# Altium PCB Conn_Batt_Panel.PcbDoc
Units mm, origin at the board's own origin, x right, y up, seen from the top; angles counter-clockwise.
Board outline 96 x 38 mm, 2 copper layers (Component Side, Solder Side), stack 1.57 mm thick; 26 components, 7 nets, 66 pads, 0 vias.
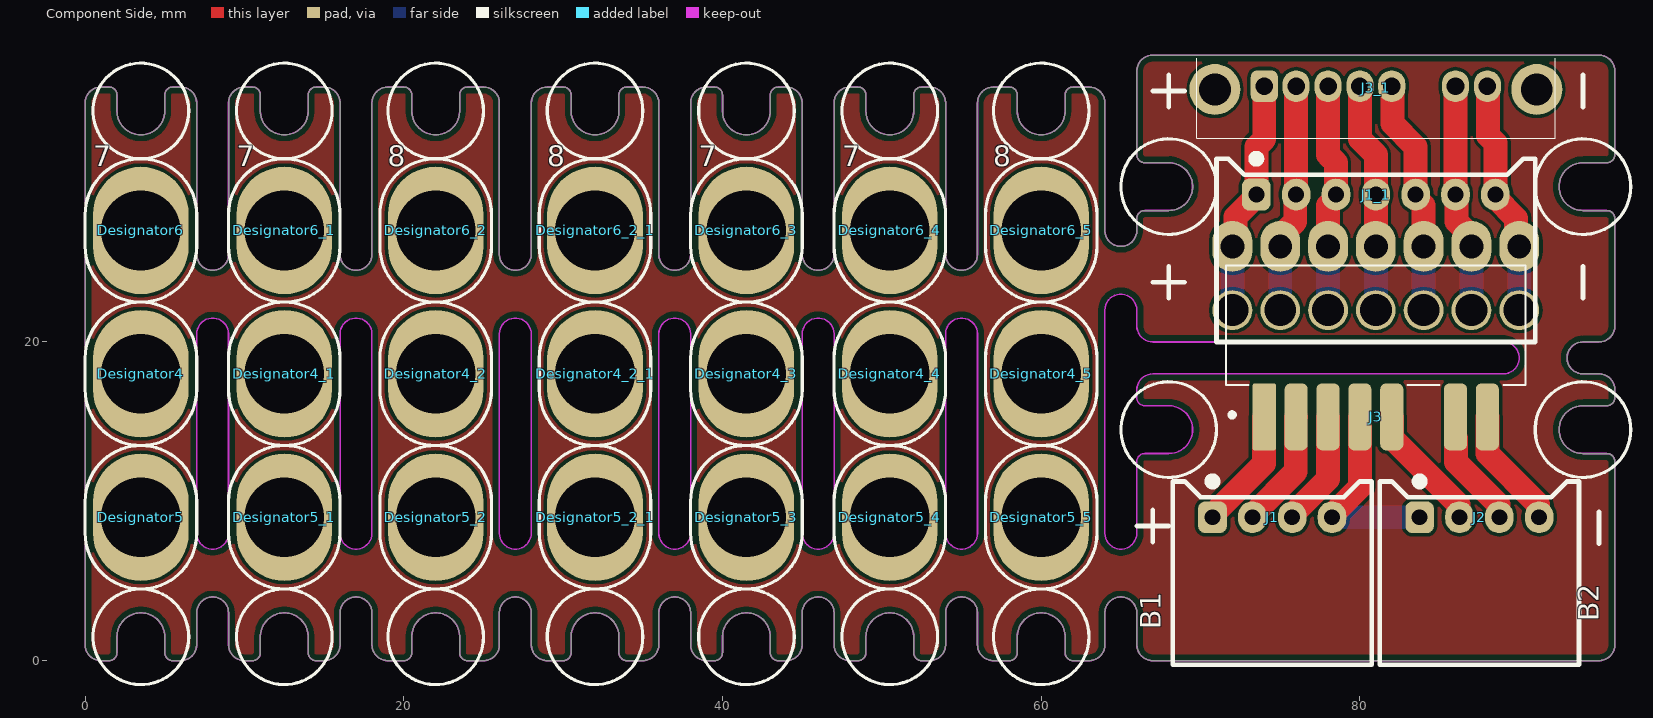
[diagram p0: Component Side view]
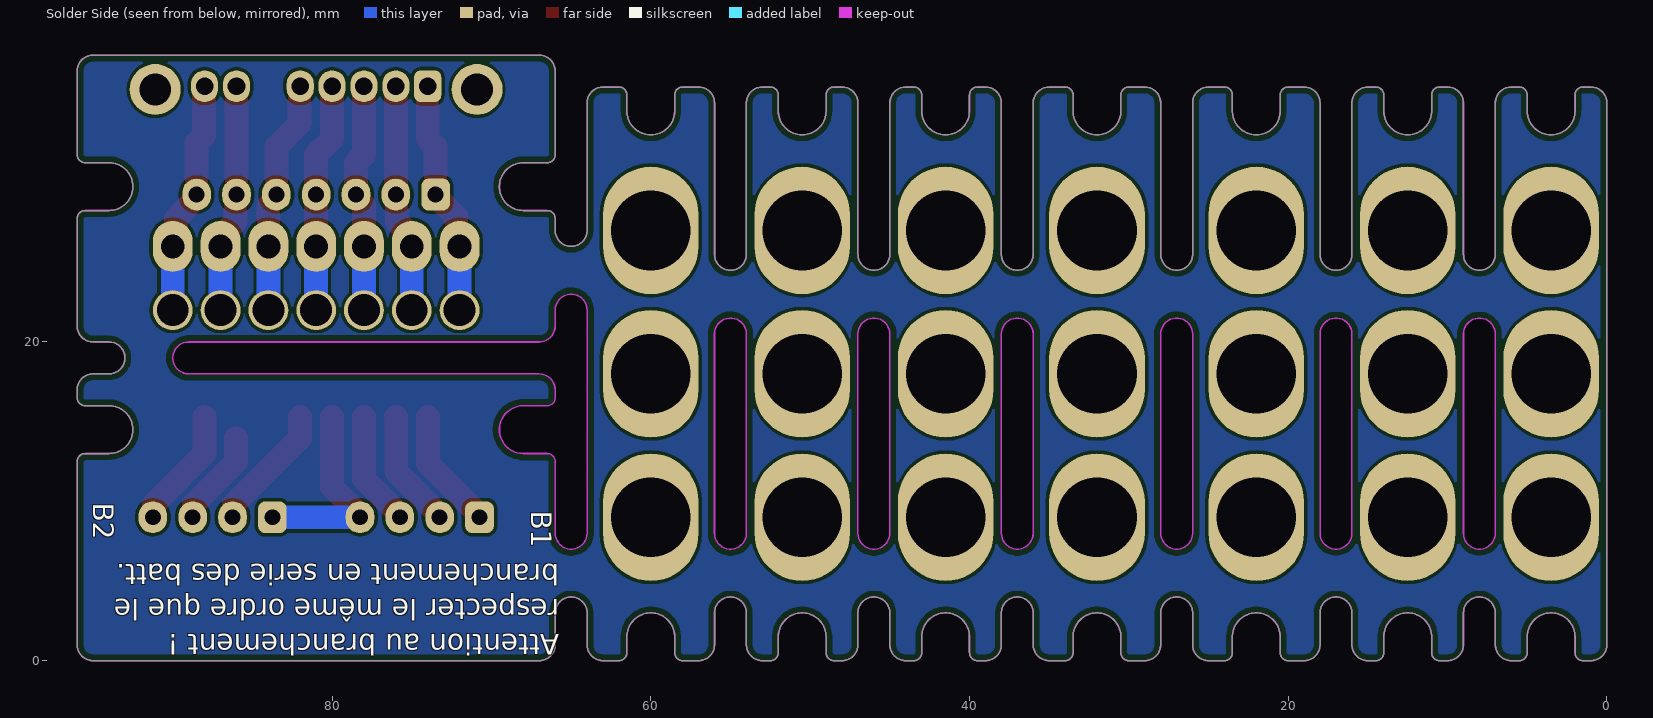
[diagram p1: Solder Side view, seen from below]

## Layer stack, top to bottom
Top Solder: solder mask 0.01, Solder Resist, Dk 3.5
Component Side: signal copper 0.035
Dielectric 1: core 1.5, FR-4, Dk 4.8
Solder Side: signal copper 0.035
Bottom Solder: solder mask 0.01, Solder Resist, Dk 3.5

## Board outline
1,0 cw(c1,1) 0,1 0,35 cw(c1,35) 1,36 1.5,36 cw(c1.5,35.5) 2,35.5 2,34.5 ccw(c3.5,34.5) 5,34.5 5,35.5 cw(c5.5,35.5) 5.5,36 6,36 cw(c6,35) 7,35 7,25.5 ccw(c8,25.5) 9,25.5 9,35 cw(c10,35) 10,36 10.5,36 cw(c10.5,35.5) 11,35.5 11,34.5 ccw(c12.5,34.5) 14,34.5 14,35.5 cw(c14.5,35.5) 14.5,36 15,36 cw(c15,35) 16,35 16,25.5 ccw(c17,25.5) 18,25.5 18,35 cw(c19,35) 19,36 20,36 cw(c20,35.5) 20.5,35.5 20.5,34.5 ccw(c22,34.5) 23.5,34.5 23.5,35.5 cw(c24,35.5) 24,36 25,36 cw(c25,35) 26,35 26,25.5 ccw(c27,25.5) 28,25.5 28,35 cw(c29,35) 29,36 30,36 cw(c30,35.5) 30.5,35.5 30.5,34.5 ccw(c32,34.5) 33.5,34.5 33.5,35.5 cw(c34,35.5) 34,36 35,36 cw(c35,35) 36,35 36,25.5 ccw(c37,25.5) 38,25.5 38,35 cw(c39,35) 39,36 39.5,36 cw(c39.5,35.5) 40,35.5 40,34.5 ccw(c41.5,34.5) 43,34.5 43,35.5 cw(c43.5,35.5) 43.5,36 44,36 cw(c44,35) 45,35 45,25.5 ccw(c46,25.5) 47,25.5 47,35 cw(c48,35) 48,36 48.5,36 cw(c48.5,35.5) 49,35.5 49,34.5 ccw(c50.5,34.5) 52,34.5 52,35.5 cw(c52.5,35.5) 52.5,36 53,36 cw(c53,35) 54,35 54,25.5 ccw(c55,25.5) 56,25.5 56,35 cw(c57,35) 57,36 58,36 cw(c58,35.5) 58.5,35.5 58.5,34.5 ccw(c60,34.5) 61.5,34.5 61.5,35.5 cw(c62,35.5) 62,36 63,36 cw(c63,35) 64,35 64,27 ccw(c65,27) 66,27 66,27.75 cw(c66.5,27.75) 66.5,28.25 68,28.25 ccw(c68,29.75) 68,31.25 66.5,31.25 cw(c66.5,31.75) 66,31.75 66,37 cw(c67,37) 67,38 95.002,38 95,38 cw(c95,37) 96,37 96,31.75 cw(c95.5,31.75) 95.5,31.25 94,31.25 ccw(c94,29.75) 94,28.25 95.5,28.25 cw(c95.5,27.75) 96,27.75 96,21 cw(c95,21) 95,20 94,20 ccw(c94,19) 94,18 95,18 cw(c95,17) 96,17 96,16.5 cw(c95.5,16.5) 95.5,16 94,16 ccw(c94,14.5) 94,13 95.5,13 cw(c95.5,12.5) 96,12.5 96,1 cw(c95,1) 95,0 67,0 cw(c67,1) 66,1 66,3 ccw(c65,3) 64,3 64,1 cw(c63,1) 63,0 62,0 cw(c62,0.5) 61.5,0.5 61.5,1.5 ccw(c60,1.5) 58.5,1.5 58.5,0.5 cw(c58,0.5) 58,0 57,0 cw(c57,1) 56,1 56,3 ccw(c55,3) 54,3 54,1 cw(c53,1) 53,0 52.5,0 cw(c52.5,0.5) 52,0.5 52,1.5 ccw(c50.5,1.5) 49,1.5 49,0.5 cw(c48.5,0.5) 48.5,0 48,0 cw(c48,1) 47,1 47,3 ccw(c46,3) 45,3 45,1 cw(c44,1) 44,0 43.5,0 cw(c43.5,0.5) 43,0.5 43,1.5 ccw(c41.5,1.5) 40,1.5 40,0.5 cw(c39.5,0.5) 39.5,0 39,0 cw(c39,1) 38,1 38,3 ccw(c37,3) 36,3 36,1 cw(c35,1) 35,0 34,0 cw(c34,0.5) 33.5,0.5 33.5,1.5 ccw(c32,1.5) 30.5,1.5 30.5,0.5 cw(c30,0.5) 30,0 29,0 cw(c29,1) 28,1 28,3 ccw(c27,3) 26,3 26,1 cw(c25,1) 25,0 24,0 cw(c24,0.5) 23.5,0.5 23.5,1.5 ccw(c22,1.5) 20.5,1.5 20.5,0.5 cw(c20,0.5) 20,0 19,0 cw(c19,1) 18,1 18,3 ccw(c17,3) 16,3 16,1 cw(c15,1) 15,0 14.5,0 cw(c14.5,0.5) 14,0.5 14,1.5 ccw(c12.5,1.5) 11,1.5 11,0.5 cw(c10.5,0.5) 10.5,0 10,0 cw(c10,1) 9,1 9,3 ccw(c8,3) 7,3 7,1 cw(c6,1) 6,0 5.5,0 cw(c5.5,0.5) 5,0.5 5,1.5 ccw(c3.5,1.5) 2,1.5 2,0.5 cw(c1.5,0.5) 1.5,0
cut-out: 54,8 54,20.5 cw(c55,20.5) 56,20.5 56,8 cw(c55,8)
cut-out: 45,8 45,20.5 cw(c46,20.5) 47,20.5 47,8 cw(c46,8)
cut-out: 36,8 36,20.5 cw(c37,20.5) 38,20.5 38,8 cw(c37,8)
cut-out: 26,8 26,20.5 cw(c27,20.5) 28,20.5 28,8 cw(c27,8)
cut-out: 16,8 16,20.5 cw(c17,20.5) 18,20.5 18,8 cw(c17,8)
cut-out: 7,8 7,20.5 cw(c8,20.5) 9,20.5 9,8 cw(c8,8)
cut-out: 64,8 ccw(c65,8) 66,8 66,12.5 cw(c66.5,12.5) 66.5,13 68,13 ccw(c68,14.5) 68,16 66.5,16 cw(c66.5,16.5) 66,16.5 66,17 cw(c67,17) 67,18 89,18 ccw(c89,19) 89,20 67,20 cw(c67,21) 66,21 66,22 ccw(c65,22) 64,22

## Design rules (kind name [scope] priority, off if disabled: settings)
AssemblyTestPointUsage [All] p1 off:
AssemblyTestpoint [All] p1 off: testpointundercomponent=TRUE minsize=1.016 maxsize=2.54 preferedsize=1.524 minholesize=0 maxholesize=1.016 preferedholesize=0.813 testpointgrid=0.025 usegrid=TRUE gridtolerance=0 allowsidetop=TRUE allowsidebottom=TRUE
BoardOutlineClearance [All] p1: gap=0.4 ignorepadtopadclearanceinfootprint=FALSE
Clearance Clearance_polygon [InPolygon] p1: gap=0.2 ignorepadtopadclearanceinfootprint=FALSE except(0: Arc-Hole Track-Hole SMDPad-Hole THPad-Hole Via-Hole Fill-Hole Poly-Hole Region-Hole Text-Hole)
Clearance Clearance_for_power_net [InNetClass('Power') vs InNet('GND')] p2: gap=0.2 ignorepadtopadclearanceinfootprint=TRUE except(0: Arc-Hole Track-Hole SMDPad-Hole THPad-Hole Via-Hole Fill-Hole Poly-Hole Region-Hole Text-Hole)
Clearance Clearance_general [All] p3: gap=0.127 ignorepadtopadclearanceinfootprint=FALSE except(0: Arc-Hole Track-Hole SMDPad-Hole THPad-Hole Via-Hole Fill-Hole Poly-Hole Region-Hole Text-Hole)
ComponentClearance [All] p1: gap=0 collisioncheckmode=3 verticalgap=0 showdistances=FALSE
DiffPairsRouting [All] p1 off: maxlimit=0.254 minlimit=0.127 mostfreqgap=0.254 toplayer_minwidth=0.381 toplayer_maxwidth=0.381 toplayer_prefwidth=0.381 bottomlayer_minwidth=0.381 bottomlayer_maxwidth=0.381 bottomlayer_prefwidth=0.381 maxuncoupledlength=12.7
FabricationTestPointUsage TestPointUsage [All] p1 off: valid=0 allowmultiple=FALSE
FabricationTestpoint Testpoint [All] p1 off: side=3 testpointundercomponent=TRUE minsize=1.016 maxsize=2.54 preferedsize=1.524 minholesize=0 maxholesize=1.016 preferedholesize=0.813 testpointgrid=0.025 allowsidetop=TRUE allowsidebottom=TRUE usegrid=TRUE gridtolerance=0
FanoutControl Fanout_BGA [IsBGA] p1 off: bgadir=Out bgaviamode=Centered fanoutstyle=Auto fanoutdirection=Alternating viagrid=0.025 // Fanout_BGA (Default Rule)
FanoutControl Fanout_LCC [IsLCC] p2 off: bgadir=Out bgaviamode=Centered fanoutstyle=Auto fanoutdirection=Alternating viagrid=0.025 // Fanout_LCC (Default Rule)
FanoutControl Fanout_SOIC [IsSOIC] p3 off: bgadir=Out bgaviamode=Centered fanoutstyle=Auto fanoutdirection=Alternating viagrid=0.025 // Fanout_SOIC (Default Rule)
FanoutControl Fanout_Small [(CompPinCount < 5)] p4 off: bgadir=Out bgaviamode=Centered fanoutstyle=Auto fanoutdirection=OutThenIn viagrid=0.025 // Fanout_Small (Default Rule)
FanoutControl Fanout_Default [All] p5 off: bgadir=Out bgaviamode=Centered fanoutstyle=Auto fanoutdirection=Alternating viagrid=0.025 // Fanout_Default (Default Rule)
Height [All] p1: minheight=0 maxheight=50 prefheight=10
HoleSize [All] p1: absolutevalues=TRUE maxlimit=6.3 minlimit=0.2 maxpercent=80.000 minpercent=20.000
HoleToHoleClearance [All] p1: gap=0.4 allowstackedmicrovias=TRUE
MinimumAnnularRing [All] p1: minimumring=0.076
MinimumSolderMaskSliver [All] p1: minsoldermaskwidth=0.15
MinimumSolderMaskSliver SilkscreenOverComponentPads [All] p2 off: minsoldermaskwidth=0.254
NetAntennae [All] p1 off: netantennaetolerance=0
PlaneClearance [All] p1: clearance=0.5
PlaneConnect [All] p1: planeconnectstyle=Relief reliefexpansion=0.4 reliefentries=4 reliefconductorwidth=0.3 reliefairgap=0.2
PolygonConnect [All] p1: thpad.connectstyle=Relief thpad.reliefconductorwidth=0.25 thpad.reliefentries=4 thpad.polygonreliefangle="90 Angle" thpad.airgapwidth=0.254 smdpad.connectstyle=Relief smdpad.reliefconductorwidth=0.25 smdpad.reliefentries=4 smdpad.polygonreliefangle="90 Angle" smdpad.airgapwidth=0.254 via.connectstyle=Direct via.reliefconductorwidth=0.25 via.reliefentries=4 via.polygonreliefangle="90 Angle" via.airgapwidth=0.254
PolygonConnect PolygonConnect_Via_GND [All vs (InNet('GND') AND  IsVia)] p2: thpad.connectstyle=Relief thpad.reliefconductorwidth=0.25 thpad.reliefentries=4 thpad.polygonreliefangle="90 Angle" thpad.airgapwidth=0.254 smdpad.connectstyle=Relief smdpad.reliefconductorwidth=0.25 smdpad.reliefentries=4 smdpad.polygonreliefangle="90 Angle" smdpad.airgapwidth=0.254 via.connectstyle=Direct via.reliefconductorwidth=0.25 via.reliefentries=4 via.polygonreliefangle="90 Angle" via.airgapwidth=0.254
PolygonConnect PolygonConnect_Via_Power [(InNetClass('Power')  AND  IsVia)] p3: connectstyle=Relief reliefconductorwidth=0.25 reliefentries=4 polygonreliefangle="90 Angle" airgapwidth=0.254
RoutingCorners [All] p1: cornerstyle=45-Degree minsetback=1.5 maxsetback=2.54
RoutingVias [All] p1: holewidth=0.3 width=0.6 viastyle="Through Hole" minholewidth=0.3 minwidth=0.6 maxholewidth=0.3 maxwidth=1
SilkToSilkClearance [All] p1 off: silktosilkclearance=0.1
SolderMaskExpansion [All] p1: expansion=0.075 istentingtop=FALSE
Width [All] p1: maxlimit=15 minlimit=0.127 preferedwidth=0.5
10 further rules are at their usual default settings.

## Components (designator, comment, footprint, x,y, rotation, side; value= is the part's Value field where it differs from the comment)
Designator4 "Comment" CONN_Bullet-3.5-F 3.5,18 r0 top
Designator4_1 "Comment" CONN_Bullet-3.5-F 12.5,18 r0 top
Designator4_2 "Comment" CONN_Bullet-3.5-F 22,18 r0 top
Designator4_2_1 "Comment" CONN_Bullet-3.5-F 32,18 r0 top
Designator4_3 "Comment" CONN_Bullet-3.5-M 41.5,18 r0 top
Designator4_4 "Comment" CONN_Bullet-3.5-M 50.5,18 r0 top
Designator4_5 "Comment" CONN_Bullet-3.5-M 60,18 r0 top
Designator5 "Comment" CONN_Bullet-4-F 3.5,9 r0 top
Designator5_1 "Comment" CONN_Bullet-4-F 12.5,9 r0 top
Designator5_2 "Comment" CONN_Bullet-4-F 22,9 r0 top
Designator5_2_1 "Comment" CONN_Bullet-4-F 32,9 r0 top
Designator5_3 "Comment" CONN_Bullet-4-M 41.5,9 r0 top
Designator5_4 "Comment" CONN_Bullet-4-M 50.5,9 r0 top
Designator5_5 "Comment" CONN_Bullet-4-M 60,9 r0 top
Designator6 "Comment" CONN_Bullet-4-F 3.5,27 r0 top
Designator6_1 "Comment" CONN_Bullet-4-F 12.5,27 r0 top
Designator6_2 "Comment" CONN_Bullet-4-F 22,27 r0 top
Designator6_2_1 "Comment" CONN_Bullet-4-F 32,27 r0 top
Designator6_3 "Comment" CONN_Bullet-4-M 41.5,27 r0 top
Designator6_4 "Comment" CONN_Bullet-4-M 50.5,27 r0 top
Designator6_5 "Comment" CONN_Bullet-4-M 60,27 r0 top
J1 "Comment" CONN_JST_S4B-XH-A 74.5,9 r0 top
J1_1 "Comment" CONN_JST_S7B-XH-A 81,29.25 r0 top
J2 "Comment" CONN_JST_S4B-XH-A 87.5,9 r0 top
J3 "Comment" CONN_TE_1827684-1 81,15.3 r180 top
J3_1 "Comment" Conn_TE_1-1827654-1 81,36.05 r180 top

## Footprints (in the part's own frame and the unit in brackets; to place one, negate y for a bottom-side part, rotate by r counter-clockwise, add the part's x,y. Pads: shape width x height; smd on the part's side, far side on the other; paste and mask are expansions set on the pad)
CONN_Bullet-3.5-F [mm] "bullet connector  3,5mm femelle"
  oval 6x8 hole 5: 1(0,0)
  silkscreen extent -3.5,-4.5 3.5,4.5, body extent -2.4,-2.4 2.4,2.4, height 9.65
CONN_Bullet-3.5-M [mm] "bullet connector  3,5mm male"
  oval 6x8 hole 5: 1(0,0)
  silkscreen extent -3.5,-4.5 3.5,4.5, body extent -2.5,-2.5 2.5,2.5, height 9.85
CONN_Bullet-4-F [mm] "bullet connector 4mm femelle"
  oval 6x8 hole 5: 1(0,0)
  silkscreen extent -3.5,-4.5 3.5,4.5, body extent -2.4,-2.4 2.4,2.4, height 10
CONN_Bullet-4-M [mm] "bullet connector 4mm male"
  oval 6x8 hole 5: 1(0,0)
  silkscreen extent -3.5,-4.5 3.5,4.5, body extent -2.5,-2.5 2.5,2.5, height 17.4
CONN_JST_S4B-XH-A [mm]
  rrect50% 1.8x2 hole 1: 1(-3.75,0)
  oval 1.8x2 hole 1: 2(-1.25,0) 3(1.25,0) 4(3.75,0)
  silkscreen extent -6.25,-9.25 6.25,2.5, body extent -6.2,-9.2 6.2,2.3, height 6.1
CONN_JST_S7B-XH-A [mm]
  rrect50% 1.8x2 hole 1: 1(-7.5,0)
  oval 1.8x2 hole 1: 2(-5,0) 3(-2.5,0) 4(0,0) 5(2.5,0) 6(5,0) 7(7.5,0)
  silkscreen extent -10,-9.25 10,2.5, body extent -9.95,-9.2 9.95,2.3, height 6.1
Conn_TE_1-1827654-1 [mm]
  rrect50% 1.7x2 hole 1.1 mask+0.05: 1(7,0)
  oval 1.7x2 hole 1.1: 2(5,0) 3(3,0) 4(1,0) 5(-1,0) 6(-5,0) 7(-7,0)
  rrect100% 3.2x3.2 hole 2 mask+0.05: 8(-10.1,0.2) 9(10.1,0.2)
  silkscreen extent -11.25,-1.75 11.25,3.25, body extent -11.3,-8.1 11.3,3.3, height 4
CONN_TE_1827684-1 [mm]
  rrect15% 1.45x4.2 smd: 1(7,0)
  rrect50% 1.45x4.2 smd: 2(5,0) 3(3,0) 4(1,0) 5(-1,0) 6(-5,0) 7(-7,0)
  silkscreen extent -9.4,-9.5 9.4,0.01, body extent -9.4,-9.03 9.4,1.67, height 3.3

## Free pads (board coordinates)
  round 2.5 hole 2: 3(72,22) 3(75,22) 3(78,22) 3(81,22) 3(84,22) 3(87,22) 3(90,22)
  oval 2.5x3.2 hole 1.5: 3(72,26) 3(75,26) 3(78,26) 3(81,26) 3(84,26) 3(87,26) 3(90,26)

## Nets (pads, with @x,y where several pads share a name; then routed paths per layer and width w, separated by ;. In a path a pad name is that pad's centre, name@x,y a point inside that pad or via, vN(x,y) a via of type N, cw(c..) or ccw(c..) an arc to the next point about the centre after c; other vN are vias at no path point)
B1_1_C3: 
B1_2_C1: 
B1_2_C2: 
B1_4_GND: 
B2_2_C2: 
B2_3_C1: 
B2_4_GND: 
pads on no net: Designator4.1 Designator4_1.1 Designator4_2.1 Designator4_2_1.1 Designator4_3.1 Designator4_4.1 Designator4_5.1 Designator5.1 Designator5_1.1 Designator5_2.1 Designator5_2_1.1 Designator5_3.1 Designator5_4.1 Designator5_5.1 Designator6.1 Designator6_1.1 Designator6_2.1 Designator6_2_1.1 Designator6_3.1 Designator6_4.1 Designator6_5.1 J1.1 J1.2 J1.3 J1.4 J1_1.1 J1_1.2 J1_1.3 J1_1.4 J1_1.5 J1_1.6 J1_1.7 J2.1 J2.2 J2.3 J2.4 J3.1 J3.2 J3.3 J3.4 J3.5 J3.6 J3.7 J3_1.1 J3_1.2 J3_1.3 J3_1.4 J3_1.5 J3_1.6 J3_1.7 J3_1.8 J3_1.9
copper on no net: | length 159.4
  Component Side w1.5: 70.75,9 70.75,9.15 73.975,12.375 73.975,15.275 74,15.3 ; 72,26 72.191,26.191 72.191,27.841 73.5,29.15 73.5,29.25 73.5,32.25 74,32.75 74,36.05 73.975,36.025 ; 73.25,9 73.25,9.15 75.975,11.875 75.975,15.275 76,15.3 ; 75,26 75,26.621 75.943,27.563 75.943,29.193 76,29.25 76,36.05 75.975,36.025 ; 75.75,9 75.75,9.15 78,11.4 78,15.3 ; 78,26 78,28.569 78.5,29.069 78.5,29.25 78.5,31.25 78,31.75 78,36.05 ; 78.25,9 78.25,9.15 80,10.9 80,15.3 ; 80,36.05 80,32.75 81,31.75 81,29.25 81,26 ; 82,15.3 82.025,15.275 82.025,13.95 82.05,13.925 82.075,13.925 86.193,9.807 86.193,9.057 86.25,9 ; 82.025,36.025 82,36.05 82.038,36.012 82.038,33.712 83.5,32.25 83.5,29.25 83.5,29.069 84,28.569 84,26 ; 83.75,9 83.75,9.15 ; 86,36.05 86,29.25 86.057,29.193 86.057,27.563 87,26.621 87,26 ; 86.025,13.95 86.025,13.688 86.025,12.475 88.693,9.807 88.693,9.057 88.75,9 ; 88,15.3 88,13 91.193,9.807 91.193,9.057 91.25,9 ; 88,36.05 88.038,36.012 88.038,32.962 88.5,32.5 88.5,29.25 88.5,29.069 89.809,27.76 89.809,26.191 90,26
  Solder Side w1.5: 72,22 72,26 ; 75,22 75,26 ; 78,22 78,26 ; 78.25,9 83.75,9 ; 81,22 81,26 ; 84,22 84,26 ; 87,22 87,26 ; 90,22 90,26

## Polygon pours and split planes (outlines as drawn)
no net on Solder Side "NONET_L02_P004" (solid, pour order 4): 0,38 106,38 106,0 0,0
no net on Component Side "NONET_L01_P005" (solid, pour order 5): 0,38 106,38 106,0 0,0

## Keep-outs
Keep-Out Layer:
  lines w0.1: 95,38 cw(c95,37) 96,37 96,31.75 cw(c95.5,31.75) 95.5,31.25 94,31.25 ccw(c94,29.75) 94,28.25 95.5,28.25 cw(c95.5,27.75) 96,27.75 96,21 cw(c95,21) 95,20 94,20 ccw(c94,19) 94,18 95,18 cw(c95,17) 96,17 96,16.5 cw(c95.5,16.5) 95.5,16 94,16 ccw(c94,14.5) 94,13 95.5,13 cw(c95.5,12.5) 96,12.5 96,1 cw(c95,1) 95,0 67,0 cw(c67,1) 66,1 66,3 ccw(c65,3) 64,3 64,1 cw(c63,1) 63,0 62,0 cw(c62,0.5) 61.5,0.5 61.5,1.5 ccw(c60,1.5) 58.5,1.5 58.5,0.5 cw(c58,0.5) 58,0 57,0 cw(c57,1) 56,1 56,3 ccw(c55,3) 54,3 54,1 cw(c53,1) 53,0 52.5,0 cw(c52.5,0.5) 52,0.5 52,1.5 ccw(c50.5,1.5) 49,1.5 49,0.5 cw(c48.5,0.5) 48.5,0 48,0 cw(c48,1) 47,1 47,3 ccw(c46,3) 45,3 45,1 cw(c44,1) 44,0 43.5,0 cw(c43.5,0.5) 43,0.5 43,1.5 ccw(c41.5,1.5) 40,1.5 40,0.5 cw(c39.5,0.5) 39.5,0 39,0 cw(c39,1) 38,1 38,3 ccw(c37,3) 36,3 36,1 cw(c35,1) 35,0 34,0 cw(c34,0.5) 33.5,0.5 33.5,1.5 ccw(c32,1.5) 30.5,1.5 30.5,0.5 cw(c30,0.5) 30,0 29,0 cw(c29,1) 28,1 28,3 ccw(c27,3) 26,3 26,1 cw(c25,1) 25,0 24,0 cw(c24,0.5) 23.5,0.5 23.5,1.5 ccw(c22,1.5) 20.5,1.5 20.5,0.5 cw(c20,0.5) 20,0 19,0 cw(c19,1) 18,1 18,3 ccw(c17,3) 16,3 16,1 cw(c15,1) 15,0 14.5,0 cw(c14.5,0.5) 14,0.5 14,1.5 ccw(c12.5,1.5) 11,1.5 11,0.5 cw(c10.5,0.5) 10.5,0 10,0 cw(c10,1) 9,1 9,3 ccw(c8,3) 7,3 7,1 cw(c6,1) 6,0 5.5,0 cw(c5.5,0.5) 5,0.5 5,1.5 ccw(c3.5,1.5) 2,1.5 2,0.5 cw(c1.5,0.5) 1.5,0 1,0 cw(c1,1) 0,1 0,35 cw(c1,35) 1,36 1.5,36 cw(c1.5,35.5) 2,35.5 2,34.5 ccw(c3.5,34.5) 5,34.5 5,35.5 cw(c5.5,35.5) 5.5,36 6,36 cw(c6,35) 7,35 7,25.5 ccw(c8,25.5) 9,25.5 9,35 cw(c10,35) 10,36 10.5,36 cw(c10.5,35.5) 11,35.5 11,34.5 ccw(c12.5,34.5) 14,34.5 14,35.5 cw(c14.5,35.5) 14.5,36 15,36 cw(c15,35) 16,35 16,25.5 ccw(c17,25.5) 18,25.5 18,35 cw(c19,35) 19,36 20,36 cw(c20,35.5) 20.5,35.5 20.5,34.5 ccw(c22,34.5) 23.5,34.5 23.5,35.5 cw(c24,35.5) 24,36 25,36 cw(c25,35) 26,35 26,25.5 ccw(c27,25.5) 28,25.5 28,35 cw(c29,35) 29,36 30,36 cw(c30,35.5) 30.5,35.5 30.5,34.5 ccw(c32,34.5) 33.5,34.5 33.5,35.5 cw(c34,35.5) 34,36 35,36 cw(c35,35) 36,35 36,25.5 ccw(c37,25.5) 38,25.5 38,35 cw(c39,35) 39,36 39.5,36 cw(c39.5,35.5) 40,35.5 40,34.5 ccw(c41.5,34.5) 43,34.5 43,35.5 cw(c43.5,35.5) 43.5,36 44,36 cw(c44,35) 45,35 45,25.5 ccw(c46,25.5) 47,25.5 47,35 cw(c48,35) 48,36 48.5,36 cw(c48.5,35.5) 49,35.5 49,34.5 ccw(c50.5,34.5) 52,34.5 52,35.5 cw(c52.5,35.5) 52.5,36 53,36 cw(c53,35) 54,35 54,25.5 ccw(c55,25.5) 56,25.5 56,35 cw(c57,35) 57,36 58,36 cw(c58,35.5) 58.5,35.5 58.5,34.5 ccw(c60,34.5) 61.5,34.5 61.5,35.5 cw(c62,35.5) 62,36 63,36 cw(c63,35) 64,35 64,27 ccw(c65,27) 66,27 66,27.75 cw(c66.5,27.75) 66.5,28.25 68,28.25 ccw(c68,29.75) 68,31.25 66.5,31.25 cw(c66.5,31.75) 66,31.75 66,37 cw(c67,37) 67,38 95.002,38 ; 7,8 ccw(c8,8) 9,8 9,20.5 ccw(c8,20.5) 7,20.5 7,8 ; 16,8 ccw(c17,8) 18,8 18,20.5 ccw(c17,20.5) 16,20.5 16,8 ; 26,8 ccw(c27,8) 28,8 28,20.5 ccw(c27,20.5) 26,20.5 26,8 ; 36,8 ccw(c37,8) 38,8 38,20.5 ccw(c37,20.5) 36,20.5 36,8 ; 45,8 ccw(c46,8) 47,8 47,20.5 ccw(c46,20.5) 45,20.5 45,8 ; 54,8 ccw(c55,8) 56,8 56,20.5 ccw(c55,20.5) 54,20.5 54,8 ; 64,8 ccw(c65,8) 66,8 66,12.5 cw(c66.5,12.5) 66.5,13 68,13 ccw(c68,14.5) 68,16 66.5,16 cw(c66.5,16.5) 66,16.5 66,17 cw(c67,17) 67,18 89,18 ccw(c89,19) 89,20 67,20 cw(c67,21) 66,21 66,22 ccw(c65,22) 64,22 64,8

## Silkscreen, mask and mechanical layers (free items; w line width, h text height)
Top Overlay:
  circle w0.2: c94,29.75 r3
  circle w0.2: c68,29.75 r3
  circle w0.2: c94,14.5 r3
  circle w0.2: c68,14.5 r3
  circle w0.2: c60,1.5 r3
  circle w0.2: c60,34.5 r3
  circle w0.2: c50.5,1.5 r3
  circle w0.2: c50.5,34.5 r3
  circle w0.2: c41.5,1.5 r3
  circle w0.2: c41.5,34.5 r3
  circle w0.2: c32,34.5 r3
  circle w0.2: c32,1.5 r3
  circle w0.2: c22,1.5 r3
  circle w0.2: c22,34.5 r3
  circle w0.2: c12.5,1.5 r3
  circle w0.2: c12.5,34.5 r3
  circle w0.2: c3.5,1.5 r3
  circle w0.2: c3.5,34.5 r3
  lines w0.3: 66,8.45 68,8.45 ; 67,7.45 67,9.45 ; 67,23.75 69,23.75 ; 67,35.75 69,35.75 ; 68,22.75 68,24.75 ; 68,34.75 68,36.75 ; 94,22.75 94,24.75 ; 94,34.75 94,36.75 ; 95,7.345 95,9.345
  text "7" at 0.5,30.597 h2.2
  text "7" at 9.5,30.597 h2.2
  text "8" at 19,30.597 h2.2
  text "8" at 29,30.597 h2.2
  text "7" at 38.5,30.597 h2.2
  text "7" at 47.5,30.597 h2.2
  text "8" at 57,30.597 h2.2
  text "B2" at 95.432,2.471 h2.2 r90
  text "B1" at 67.932,1.971 h2.2 r90
Bottom Overlay:
  text "B2" at 95.432,9.921 h2.2 r90
  text "B1" at 67.932,9.421 h2.2 r90
  text "Attention au branchement ! / respecter le même ordre que le / branchement en serie des batt." at 65.75,6.5 h2.2 r180
Board Outline:
  drawing of 240 lines, arcs and shapes, not listed

## Dimensions
1.5,0 to 67,38 on Dimension
0,1 to 96,1 on Dimension

## Text inside footprints (layer, text, board x,y; h text height)
J3: Top Assembly "PCB EDGE" at 84.429,19.11 h1.2 r180
J3_1: Top Assembly "PCB EDGE" at 83.75,39.3 h1.2 r180